# EAGLE board CT_schematic (EAGLE 7.6.0)

Size 100 x 80 mm. Coordinates in mm from the lower left corner, seen from the top.
Outline: 0,0 100,0 100,80 0,80 0,0
Copper layers (1*16): Top 0.035mm / dielectric 1.5mm / Bottom 0.035mm
Design rules "default": minimum track width 10mil, minimum drill 24mil, track to track 8mil, track to pad 8mil, pad to pad 8mil, via to via 8mil, smd to smd 8mil, copper to edge 40mil, drill to drill 8mil, minimum pad ring 10mil, minimum via ring 8mil, stop-mask expansion 4mil, vias tented up to drill 0mil, thermal gap 10mil

## Footprints (pad centres in the part's own frame; a part is rotated, then mirrored left to right if it is on the bottom)
C0603 = smd 0.8 x 0.8: 1 -0.762,0; 2 0.762,0
C0402 = smd 0.5 x 0.5: 1 -0.508,0; 2 0.508,0
C0805 = smd 1.2 x 1.3: 1 -1.016,0; 2 1.016,0
C1210 = smd 1.2 x 2.5: 1 -1.524,0; 2 1.524,0
C1206 = smd 1.3 x 1.6: 1 -1.524,0; 2 1.524,0
R0603 = smd 0.8 x 0.8: 1 -0.762,0; 2 0.762,0
EXV-9H = smd 3.505 x 1.676: 1 -2.857,0; 2 2.857,0
L0603 = smd 0.8 x 0.8: 1 -0.762,0; 2 0.762,0
DR1040 = smd 1.6 x 3.2: 1 -4.458,0; 2 4.458,0
PJ-037B_PACKAGE = drill 3.7 square: 1 12,0 | drill 3.2 square: 2 6,0
UFBGA176_25 = smd 0.3 x 0.3: A1 -4.55,4.55; A2 -3.9,4.55; A3 -3.25,4.55; A4 -2.6,4.55; A5 -1.95,4.55; A6 -1.3,4.55; A7 -0.65,4.55; A8 0,4.55; A9 0.65,4.55; A10 1.3,4.55; A11 1.95,4.55; A12 2.6,4.55; A13 3.25,4.55; A14 3.9,4.55; A15 4.55,4.55; B1 -4.55,3.9; B2 -3.9,3.9; B3 -3.25,3.9; B4 -2.6,3.9; B5 -1.95,3.9; B6 -1.3,3.9; B7 -0.65,3.9; B8 0,3.9; B9 0.65,3.9; B10 1.3,3.9; B11 1.95,3.9; B12 2.6,3.9; B13 3.25,3.9; B14 3.9,3.9; B15 4.55,3.9; C1 -4.55,3.25; C2 -3.9,3.25; C3 -3.25,3.25; C4 -2.6,3.25; C5 -1.95,3.25; C6 -1.3,3.25; C7 -0.65,3.25; C8 0,3.25; C9 0.65,3.25; C10 1.3,3.25; C11 1.95,3.25; C12 2.6,3.25; C13 3.25,3.25; C14 3.9,3.25; C15 4.55,3.25; D1 -4.55,2.6; D2 -3.9,2.6; D3 -3.25,2.6; D4 -2.6,2.6; D5 -1.95,2.6; D6 -1.3,2.6; D7 -0.65,2.6; D8 0,2.6; D9 0.65,2.6; D10 1.3,2.6; D11 1.95,2.6; D12 2.6,2.6; D13 3.25,2.6; D14 3.9,2.6; D15 4.55,2.6; E1 -4.55,1.95; E2 -3.9,1.95; E3 -3.25,1.95; E4 -2.6,1.95; E12 2.6,1.95; E13 3.25,1.95; E14 3.9,1.95; E15 4.55,1.95; F1 -4.55,1.3; F2 -3.9,1.3; F3 -3.25,1.3; F4 -2.6,1.3; F6 -1.3,1.3; F7 -0.65,1.3; F8 0,1.3; F9 0.65,1.3; F10 1.3,1.3; F12 2.6,1.3; F13 3.25,1.3; F14 3.9,1.3; F15 4.55,1.3; G1 -4.55,0.65; G2 -3.9,0.65; G3 -3.25,0.65; G4 -2.6,0.65; G6 -1.3,0.65; G7 -0.65,0.65; G8 0,0.65; G9 0.65,0.65; G10 1.3,0.65; G12 2.6,0.65; G13 3.25,0.65; G14 3.9,0.65; G15 4.55,0.65; H1 -4.55,0; H2 -3.9,0; H3 -3.25,0; H4 -2.6,0; H6 -1.3,0; H7 -0.65,0; H8 0,0; H9 0.65,0; H10 1.3,0; H12 2.6,0; H13 3.25,0; H14 3.9,0; H15 4.55,0; J1 -4.55,-0.65; J2 -3.9,-0.65; J3 -3.25,-0.65; J4 -2.6,-0.65; J6 -1.3,-0.65; J7 -0.65,-0.65; J8 0,-0.65; J9 0.65,-0.65; J10 1.3,-0.65; J12 2.6,-0.65; J13 3.25,-0.65; J14 3.9,-0.65; J15 4.55,-0.65; K1 -4.55,-1.3; K2 -3.9,-1.3; K3 -3.25,-1.3; K4 -2.6,-1.3; K6 -1.3,-1.3; K7 -0.65,-1.3; K8 0,-1.3; K9 0.65,-1.3; K10 1.3,-1.3; K12 2.6,-1.3; K13 3.25,-1.3; K14 3.9,-1.3; K15 4.55,-1.3; L1 -4.55,-1.95; L2 -3.9,-1.95; L3 -3.25,-1.95; L4 -2.6,-1.95; L12 2.6,-1.95; L13 3.25,-1.95; L14 3.9,-1.95; L15 4.55,-1.95; M1 -4.55,-2.6; M2 -3.9,-2.6; M3 -3.25,-2.6; M4 -2.6,-2.6; M5 -1.95,-2.6; M6 -1.3,-2.6; M7 -0.65,-2.6; M8 0,-2.6; M9 0.65,-2.6; M10 1.3,-2.6; M11 1.95,-2.6; M12 2.6,-2.6; M13 3.25,-2.6; M14 3.9,-2.6; M15 4.55,-2.6; N1 -4.55,-3.25; N2 -3.9,-3.25; N3 -3.25,-3.25; N4 -2.6,-3.25; N5 -1.95,-3.25; N6 -1.3,-3.25; N7 -0.65,-3.25; N8 0,-3.25; N9 0.65,-3.25; N10 1.3,-3.25; N11 1.95,-3.25; N12 2.6,-3.25; N13 3.25,-3.25; N14 3.9,-3.25; N15 4.55,-3.25; P1 -4.55,-3.9; P2 -3.9,-3.9; P3 -3.25,-3.9; P4 -2.6,-3.9; P5 -1.95,-3.9; P6 -1.3,-3.9; P7 -0.65,-3.9; P8 0,-3.9; P9 0.65,-3.9; P10 1.3,-3.9; P11 1.95,-3.9; P12 2.6,-3.9; P13 3.25,-3.9; P14 3.9,-3.9; P15 4.55,-3.9; R1 -4.55,-4.55; R2 -3.9,-4.55; R3 -3.25,-4.55; R4 -2.6,-4.55; R5 -1.95,-4.55; R6 -1.3,-4.55; R7 -0.65,-4.55; R8 0,-4.55; R9 0.65,-4.55; R10 1.3,-4.55; R11 1.95,-4.55; R12 2.6,-4.55; R13 3.25,-4.55; R14 3.9,-4.55; R15 4.55,-4.55
ARDUCAM = drill 1 pad 1.8 square: 1 0,0 | drill 1 pad 1.8: 2 0,2.54; 3 2.54,0; 4 2.54,2.54; 5 5.08,0; 6 5.08,2.54; 7 7.62,0; 8 7.62,2.54; 9 10.16,0; 10 10.16,2.54; 11 12.7,0; 12 12.7,2.54; 13 15.24,0; 14 15.24,2.54; 15 17.78,0; 16 17.78,2.54; 17 20.32,0; 18 20.32,2.54; 19 22.86,0; 20 22.86,2.54
SSOP-28 = smd 1.5 x 0.4: 1 -3.625,4.225; 2 -3.625,3.575; 3 -3.625,2.925; 4 -3.625,2.275; 5 -3.625,1.625; 6 -3.625,0.975; 7 -3.625,0.325; 8 -3.625,-0.325; 9 -3.625,-0.975; 10 -3.625,-1.625; 11 -3.625,-2.275; 12 -3.625,-2.925; 13 -3.625,-3.575; 14 -3.625,-4.225; 15 3.625,-4.225; 16 3.625,-3.575; 17 3.625,-2.925; 18 3.625,-2.275; 19 3.625,-1.625; 20 3.625,-0.975; 21 3.625,-0.325; 22 3.625,0.325; 23 3.625,0.975; 24 3.625,1.625; 25 3.625,2.275; 26 3.625,2.925; 27 3.625,3.575; 28 3.625,4.225
FCI_10118193-0001LF = smd 0.4 x 1.35: 1 -1.3,2.675; 2 -0.65,2.675; 3 0,2.675; 4 0.65,2.675; 5 1.3,2.675 | smd 1.6 x 1.4: 6 -3.2,2.45; 7 3.2,2.45 | smd 1.9 x 1.9: 8 -1.2,0; 9 1.2,0 | hole 0.5: -3.3,0; 3.3,0
SAMTEC_FTSH-105-01-L-DV-K = smd 0.762 x 2.794: 1 -2.54,-2.032; 2 -2.54,2.032; 3 -1.27,-2.032; 4 -1.27,2.032; 5 0,-2.032; 6 0,2.032; 7 1.27,-2.032; 8 1.27,2.032; 9 2.54,-2.032; 10 2.54,2.032
LGA-8 = smd 0.838 x 0.559: 1 -1.003,1.875; 2 -1.003,0.625; 3 -1.003,-0.625; 4 -1.003,-1.875; 5 1.003,-1.875; 6 1.003,-0.625; 7 1.003,0.625; 8 1.003,1.875
LBGA-64 = smd 0.559 x 0.559: A1 -3.5,3.5; A2 -2.5,3.5; A3 -1.5,3.5; A4 -0.5,3.5; A5 0.5,3.5; A6 1.5,3.5; A7 2.5,3.5; A8 3.5,3.5; B1 -3.5,2.5; B2 -2.5,2.5; B3 -1.5,2.5; B4 -0.5,2.5; B5 0.5,2.5; B6 1.5,2.5; B7 2.5,2.5; B8 3.5,2.5; C1 -3.5,1.5; C2 -2.5,1.5; C3 -1.5,1.5; C4 -0.5,1.5; C5 0.5,1.5; C6 1.5,1.5; C7 2.5,1.5; C8 3.5,1.5; D1 -3.5,0.5; D2 -2.5,0.5; D3 -1.5,0.5; D4 -0.5,0.5; D5 0.5,0.5; D6 1.5,0.5; D7 2.5,0.5; D8 3.5,0.5; E1 -3.5,-0.5; E2 -2.5,-0.5; E3 -1.5,-0.5; E4 -0.5,-0.5; E5 0.5,-0.5; E6 1.5,-0.5; E7 2.5,-0.5; E8 3.5,-0.5; F1 -3.5,-1.5; F2 -2.5,-1.5; F3 -1.5,-1.5; F4 -0.5,-1.5; F5 0.5,-1.5; F6 1.5,-1.5; F7 2.5,-1.5; F8 3.5,-1.5; G1 -3.5,-2.5; G2 -2.5,-2.5; G3 -1.5,-2.5; G4 -0.5,-2.5; G5 0.5,-2.5; G6 1.5,-2.5; G7 2.5,-2.5; G8 3.5,-2.5; H1 -3.5,-3.5; H2 -2.5,-3.5; H3 -1.5,-3.5; H4 -0.5,-3.5; H5 0.5,-3.5; H6 1.5,-3.5; H7 2.5,-3.5; H8 3.5,-3.5
SOT143B = smd 1 x 0.7: 1 -0.75,-1 | smd 0.6 x 0.7: 2 0.95,-1; 3 0.95,1; 4 -0.95,1
ABLS-25.000MHZ-B2F-T = smd 5.6 x 2.8: 1 -3.81,0; 2 5.69,0
ABLS-12.000MHZ-B4-T = smd 5.6 x 2.8: 1 0,0; 2 9.5,0
ASEK = smd 1.4 x 1: 1 -1.1,-0.8; 2 1.1,-0.8; 3 1.1,0.8; 4 -1.1,0.8
ASFL1 = smd 1.7 x 1.5: 1 -1.27,-1.1; 2 1.27,-1.1; 3 1.27,1.1; 4 -1.27,1.1
WSON-8 = smd 0.3 x 0.6: 1 -0.75,0; 2 0.05,0; 3 0.85,0; 4 1.65,0; 5 1.65,3.8; 6 0.85,3.8; 7 0.05,3.8; 8 -0.75,3.8 | smd 3 x 2.6: PAD 0.45,1.9
HTSSOP14 = smd 1.676 x 0.356: 1 -2.8,1.95; 2 -2.8,1.3; 3 -2.8,0.65; 4 -2.8,0; 5 -2.8,-0.65; 6 -2.8,-1.3; 7 -2.8,-1.95; 8 2.8,-1.95; 9 2.8,-1.3; 10 2.8,-0.65; 11 2.8,0; 12 2.8,0.65; 13 2.8,1.3; 14 2.8,1.95 | smd 3 x 5: 15 0,0 | drill 0.4 pad 0.45: P$1 -0.75,1.5; P$2 0.75,1.5; P$3 -0.75,0; P$4 0.8,0; P$5 -0.75,-1.5; P$6 0.9,-1.5
QFN-38_UHF = smd 0.75 x 0.3: 1 -2.4,2.75; 2 -2.4,2.25; 3 -2.4,1.75; 4 -2.4,1.25; 6 -2.4,0.25; 7 -2.4,-0.25; 8 -2.4,-0.75; 9 -2.4,-1.25; 10 -2.4,-1.75; 11 -2.4,-2.25; 12 -2.4,-2.75; 20 2.4,-2.75; 21 2.4,-2.25; 22 2.4,-1.75; 23 2.4,-1.25; 24 2.4,-0.75; 25 2.4,-0.25; 26 2.4,0.25; 27 2.4,0.75; 28 2.4,1.25; 29 2.4,1.75; 30 2.4,2.25; 31 2.4,2.75 | smd 0.758 x 0.3: 5 -2.4,0.75 | smd 0.3 x 0.75: 13 -1.5,-3.4; 14 -1,-3.4; 15 -0.5,-3.4; 16 0,-3.4; 17 0.5,-3.4; 18 1,-3.4; 19 1.5,-3.4; 32 1.5,3.4; 33 1,3.4; 34 0.5,3.4; 35 0,3.4; 36 -0.5,3.4; 37 -1,3.4; 38 -1.5,3.4 | smd 3.2 x 5.2: 39 0,0
IRF8306MTRPBF = smd 0.9 x 1.85: 1 0,0; 2 0,-2.35; 6 6.4,0; 7 6.4,-2.35 | smd 0.75 x 0.75: 3 1.75,-1.175 | smd 1.45 x 0.87: 4 3.5,-0.565; 5 3.5,-1.785
SW_4-1437565-2 = smd 1.4 x 2.1: 1 -2.23,4.55; 2 -2.23,-4.55; 3 2.23,4.55; 4 2.23,-4.55
LGM67K-G1J2-24-Z = smd 0.8 x 1.4: A -2,0; C 0,0
NC7SZ125M5X = smd 1.3 x 0.7: 1 -1.3,0.95; 2 -1.3,0; 3 -1.3,-0.95; 4 1.3,-0.95; 5 1.3,0.95

## Placement (x,y rotation side)
C1  1e-06  [C0603]  -41.91,76.2 0 top  (outside the outline)
C2  1e-07  [C0603]  -45.72,76.2 0 top  (outside the outline)
C3  1e-07  [C0603]  -49.53,76.2 0 top  (outside the outline)
C4  1e-07  [C0603]  -53.34,76.2 0 top  (outside the outline)
C5  1e-07  [C0603]  -57.15,76.2 0 top  (outside the outline)
C6  1e-07  [C0603]  -60.96,76.2 0 top  (outside the outline)
C7  1e-07  [C0603]  -64.77,76.2 0 top  (outside the outline)
C8  1e-07  [C0603]  -68.58,76.2 0 top  (outside the outline)
C9  1e-07  [C0603]  -72.39,76.2 0 top  (outside the outline)
C10  1e-07  [C0603]  -76.2,76.2 0 top  (outside the outline)
C11  1e-07  [C0603]  -80.01,76.2 0 top  (outside the outline)
C12  1e-07  [C0603]  -83.82,76.2 0 top  (outside the outline)
C13  1e-07  [C0603]  -87.63,76.2 0 top  (outside the outline)
C14  1e-07  [C0603]  -15.24,81.28 0 top  (outside the outline)
C15  1e-07  [C0603]  -19.05,81.28 0 top  (outside the outline)
C16  1e-07  [C0603]  -22.86,81.28 0 top  (outside the outline)
C17  4.7e-06  [C0603]  -34.29,76.2 0 top  (outside the outline)
C18  1e-08  [C0603]  -26.67,81.28 0 top  (outside the outline)
C19  1e-06  [C0603]  -30.48,81.28 0 top  (outside the outline)
C20  1e-07  [C0603]  -34.29,81.28 0 top  (outside the outline)
C21  1e-07  [C0603]  -38.1,81.28 0 top  (outside the outline)
C22  1e-07  [C0603]  -41.91,81.28 0 top  (outside the outline)
C23  1e-11  [C0402]  -31.75,86.36 0 top  (outside the outline)
C24  1e-11  [C0402]  -35.56,86.36 0 top  (outside the outline)
C26  1e-06  [C0603]  -45.72,81.28 0 top  (outside the outline)
C27  1e-07  [C0402]  -39.37,86.36 0 top  (outside the outline)
C28  4.7e-06  [C0805]  -78.74,59.69 0 top  (outside the outline)
C29  1e-07  [C0402]  -43.18,86.36 0 top  (outside the outline)
C30  1e-07  [C0402]  -46.99,86.36 0 top  (outside the outline)
C31  1e-07  [C0402]  -50.8,86.36 0 top  (outside the outline)
C32  1e-07  [C0402]  -54.61,86.36 0 top  (outside the outline)
C33  1e-05  [C0805]  -83.82,59.69 0 top  (outside the outline)
C34  1e-07  [C0402]  -58.42,86.36 0 top  (outside the outline)
C35  1e-07  [C0402]  -62.23,86.36 0 top  (outside the outline)
C36  1e-08  [C0402]  -66.04,86.36 0 top  (outside the outline)
C37  1e-08  [C0402]  -69.85,86.36 0 top  (outside the outline)
C38  1e-08  [C0402]  -73.66,86.36 0 top  (outside the outline)
C39  1e-08  [C0402]  -77.47,86.36 0 top  (outside the outline)
C40  1e-08  [C0402]  -81.28,86.36 0 top  (outside the outline)
C41  1e-05  [C1210]  -87.63,52.07 0 top  (outside the outline)
C42  1e-05  [C0805]  -88.9,59.69 0 top  (outside the outline)
C43  1e-06  [C0603]  -49.53,81.28 0 top  (outside the outline)
C44  3.3e-09  [C0402]  -27.94,86.36 0 top  (outside the outline)
C45  1e-07  [C0402]  -85.09,86.36 0 top  (outside the outline)
C46  2.2e-05  [C1210]  -16.51,59.69 0 top  (outside the outline)
C47  2.2e-05  [C1210]  -22.86,59.69 0 top  (outside the outline)
C48  1e-05  [C1206]  -41.91,59.69 0 top  (outside the outline)
C49  1e-05  [C1206]  -48.26,59.69 0 top  (outside the outline)
C50  1e-08  [C0402]  -88.9,86.36 0 top  (outside the outline)
C51  1e-05  [C1210]  -29.21,59.69 0 top  (outside the outline)
C52  1e-05  [C0805]  -15.24,66.04 0 top  (outside the outline)
C53  1e-07  [C0402]  -15.24,91.44 0 top  (outside the outline)
C54  2.2e-06  [C0603]  -38.1,76.2 0 top  (outside the outline)
C55  2.45e-08  [R0603]  -60.96,66.04 0 top  (outside the outline)
C56  2.8258362168397e-09  [R0603]  -25.4,66.04 0 top  (outside the outline)
C57  7.105e-09  [R0603]  -45.72,66.04 0 top  (outside the outline)
C58  0.0001  [EXV-9H]  -46.99,44.45 0 top  (outside the outline)
C59  0.0001  [EXV-9H]  -58.42,44.45 0 top  (outside the outline)
C60  1e-08  [C0402]  -19.05,91.44 0 top  (outside the outline)
C61  1e-08  [C0402]  -22.86,91.44 0 top  (outside the outline)
C62  1e-08  [C0402]  -26.67,91.44 0 top  (outside the outline)
C63  1e-08  [C0402]  -30.48,91.44 0 top  (outside the outline)
F1  240.0  [L0603]  -53.34,81.28 0 top  (outside the outline)
I1  7e-06  [DR1040]  -54.61,21.59 0 top  (outside the outline)
J1  PJ-037B  [PJ-037B_PACKAGE]  -27.94,24.13 0 top  (outside the outline)
R2  1000.0  [R0603]  -57.15,81.28 0 top  (outside the outline)
R7  4700.0  [R0603]  -60.96,81.28 0 top  (outside the outline)
R8  4700.0  [R0603]  -64.77,81.28 0 top  (outside the outline)
R9  4700.0  [R0603]  -68.58,81.28 0 top  (outside the outline)
R10  2200.0  [R0603]  -72.39,81.28 0 top  (outside the outline)
R12  2200.0  [R0603]  -76.2,81.28 0 top  (outside the outline)
R14  10000.0  [R0603]  -66.04,66.04 0 top  (outside the outline)
R15  10000.0  [R0603]  -71.12,66.04 0 top  (outside the outline)
R16  10000.0  [R0603]  -76.2,66.04 0 top  (outside the outline)
R17  4700.0  [R0603]  -80.01,81.28 0 top  (outside the outline)
R18  10000.0  [R0603]  -81.28,66.04 0 top  (outside the outline)
R19  10000.0  [R0603]  -86.36,66.04 0 top  (outside the outline)
R20  10000.0  [R0603]  -15.24,71.12 0 top  (outside the outline)
R21  10000.0  [R0603]  -20.32,71.12 0 top  (outside the outline)
R22  10000.0  [R0603]  -25.4,71.12 0 top  (outside the outline)
R23  10000.0  [R0603]  -30.48,71.12 0 top  (outside the outline)
R24  5.0  [R0603]  -83.82,81.28 0 top  (outside the outline)
R25  10000.0  [R0603]  -35.56,71.12 0 top  (outside the outline)
R26  10000.0  [R0603]  -40.64,71.12 0 top  (outside the outline)
R27  10000.0  [R0603]  -45.72,71.12 0 top  (outside the outline)
R28  10000.0  [R0603]  -50.8,71.12 0 top  (outside the outline)
R29  10000.0  [R0603]  -55.88,71.12 0 top  (outside the outline)
R30  100000.0  [R0603]  -50.8,66.04 0 top  (outside the outline)
R31  200.0  [R0603]  -87.63,81.28 0 top  (outside the outline)
R32  1000.0  [R0603]  -15.24,86.36 0 top  (outside the outline)
R33  71007.101651032  [R0603]  -33.02,66.04 0 top  (outside the outline)
R34  22000.0  [R0603]  -60.96,71.12 0 top  (outside the outline)
R35  100000.0  [R0603]  -55.88,66.04 0 top  (outside the outline)
R36  200.0  [R0603]  -19.05,86.36 0 top  (outside the outline)
R37  1000.0  [R0603]  -22.86,86.36 0 top  (outside the outline)
R38  10000.0  [R0603]  -66.04,71.12 0 top  (outside the outline)
R39  75000.0  [R0603]  -71.12,71.12 0 top  (outside the outline)
R40  10000.0  [R0603]  -76.2,71.12 0 top  (outside the outline)
R41  10000.0  [R0603]  -81.28,71.12 0 top  (outside the outline)
R42  95300.0  [R0603]  -86.36,71.12 0 top  (outside the outline)
R43  95300.0  [R0603]  -15.24,76.2 0 top  (outside the outline)
R44  10000.0  [R0603]  -20.32,76.2 0 top  (outside the outline)
R45  10000.0  [R0603]  -25.4,76.2 0 top  (outside the outline)
R46  10000.0  [R0603]  -30.48,76.2 0 top  (outside the outline)
R47  112254.54545455  [R0603]  -40.64,66.04 0 top  (outside the outline)
U1  STM32F745IGK6  [UFBGA176_25]  -76.2,6.35 0 top  (outside the outline)
U2  arducam_ov2640  [ARDUCAM]  -59.69,50.8 0 top  (outside the outline)
U3  FT232RL-REEL  [SSOP-28]  -34.29,7.62 0 top  (outside the outline)
U4  10118193-0001LF  [FCI_10118193-0001LF]  -76.2,34.29 0 top  (outside the outline)
U5  FTSH-105-01-L-DV-K  [SAMTEC_FTSH-105-01-L-DV-K]  -63.5,7.62 0 top  (outside the outline)
U6  MPL3115A2R1  [LGA-8]  -34.29,59.69 0 top  (outside the outline)
U7  mt28ew512aba1HPC-0AAT  [LBGA-64]  -19.05,7.62 0 top  (outside the outline)
U8  10118193-0001LF  [FCI_10118193-0001LF]  -86.36,34.29 0 top  (outside the outline)
U9  prtr5v0u2ax  [SOT143B]  -43.18,91.44 0 top  (outside the outline)
U10  ABLS-25.000MHZ-B2F-T  [ABLS-25.000MHZ-B2F-T]  -77.47,44.45 0 top  (outside the outline)
U11  ABLS-12.000MHZ-B4-T  [ABLS-12.000MHZ-B4-T]  -29.21,53.34 0 top  (outside the outline)
U12  ASEK-32.768KHz-ECST  [ASEK]  -38.1,44.45 0 top  (outside the outline)
U13  ASFL1-25MHZ-NCS  [ASFL1]  -67.31,35.56 0 top  (outside the outline)
U14  LP3878SDX-ADJ/NOPB  [WSON-8]  -30.48,34.29 0 top  (outside the outline)
U15  tps54225PWP  [HTSSOP14]  -67.31,52.07 0 top  (outside the outline)
U16  LP3878SDX-ADJ/NOPB  [WSON-8]  -50.8,34.29 0 top  (outside the outline)
U17  LTC2928CUHF#PBF  [QFN-38_UHF]  -16.51,44.45 0 top  (outside the outline)
U18  IRF8306MTRPbF  [IRF8306MTRPBF]  -73.66,22.86 0 top  (outside the outline)
U19  IRF8306MTRPbF  [IRF8306MTRPBF]  -88.9,22.86 0 top  (outside the outline)
U20  4-1437565-2  [SW_4-1437565-2]  -44.45,22.86 0 top  (outside the outline)
U21  Q65110A2395  [LGM67K-G1J2-24-Z]  -76.2,52.07 0 top  (outside the outline)
U22  nc7sz125m5x  [NC7SZ125M5X]  -53.34,59.69 0 top  (outside the outline)
U23  nc7sz125m5x  [NC7SZ125M5X]  -59.69,59.69 0 top  (outside the outline)
U24  nc7sz125m5x  [NC7SZ125M5X]  -66.04,59.69 0 top  (outside the outline)
U25  nc7sz125m5x  [NC7SZ125M5X]  -72.39,59.69 0 top  (outside the outline)

## Library data of the parts
C1-C24 C26-C63 F1 I1 J1 R2 R7-R10 R12 R14-R47 U1-U25 = circuit_tree

## Nets
CLK_CRYSTAL_U1_G1: C23.1 U1.G1 U10.1
CLK_CRYSTAL_U1_H1: C24.1 U1.H1 U10.2
CLK_CRYSTAL_U3_27: U3.27 U11.1
CLK_CRYSTAL_U3_28: U3.28 U11.2
CLK_U1_E1: U1.E1 U12.3
CLK_U2_8: U2.8 U13.3
GND: C1.2 C2.2 C3.2 C4.2 C5.2 C6.2 C7.2 C8.2 C9.2 C10.2 C11.2 C12.2 C13.2 C14.2 C15.2 C16.2 C17.2 C18.2 C19.2 C20.2 C21.2 C22.2 C23.2 C24.2 C26.2 C27.2 C28.2 C29.2 C30.2 C31.2 C32.2 C33.2 C34.2 C35.2 C36.2 C37.2 C38.2 C39.2 C40.2 C41.2 C42.2 C43.2 C44.2 C46.2 C47.2 C48.2 C49.2 C50.2 C51.2 C52.2 C53.2 C54.2 C55.2 C56.2 C57.2 C58.2 C59.2 C60.2 C61.2 C62.2 C63.2 J1.2 R2.2 R14.2 R19.2 R23.2 R24.2 R32.2 R34.2 R37.2 R39.2 R42.2 R43.2 R44.2 R45.2 R46.2 U1.D5 U1.D7 U1.D8 U1.D9 U1.F2 U1.F6 U1.F7 U1.F8 U1.F9 U1.F10 U1.F12 U1.G2 U1.G6 U1.G7 U1.G8 U1.G9 U1.G10 U1.G12 U1.H6 U1.H7 U1.H8 U1.H9 U1.H10 U1.H12 U1.J6 U1.J7 U1.J8 U1.J9 U1.J10 U1.K6 U1.K7 U1.K8 U1.K9 U1.K10 U1.M1 U1.M8 U1.M9 U1.N1 U2.2 U2.20 U3.7 U3.18 U3.21 U3.25 U3.26 U4.5 U4.6 U4.7 U4.8 U4.9 U5.3 U5.5 U6.3 U7.E8 U7.H2 U7.H7 U8.5 U8.6 U8.7 U8.8 U8.9 U9.1 U12.2 U13.2 U14.3 U14.PAD U15.5 U15.8 U15.9 U15.15 U16.3 U16.PAD U17.8 U17.9 U17.10 U17.12 U17.13 U17.24 U17.25 U17.30 U17.32 U17.39 U21.C U22.2 U22.3 U23.1 U23.3 U24.1 U24.3 U25.1 U25.3
NET_U1_A5: R10.1 U1.A5 U6.8
NET_U1_B4: R12.1 U1.B4 U6.7
NET_U1_C6: R15.1 U1.C6
NET_U1_D6: R14.1 U1.D6
NET_U1_F13: C22.1 U1.F13
NET_U1_J1: R8.1 U1.J1 U24.4
NET_U1_L4: R16.1 U1.L4
NET_U1_R1: C18.1 C19.1 F1.1 U1.P1 U1.R1
NET_U1_R14: U21.A
NET_U1_R15: U20.3 U20.4
NET_U2_19: R9.1 U2.19 U25.4
NET_U3_14: R18.1 U3.14
NET_U3_17: C29.1 U3.17
NET_U3_19: R19.1 U3.19
NET_U4_1: R17.1 U4.1
NET_U4_2: U3.16 U4.2
NET_U4_3: U3.15 U4.3
NET_U4_19: R17.2
NET_U5_9: R24.1 U5.9
NET_U6_2: C35.1 U6.2
NET_U7_B4: R28.1 U7.B4
NET_U7_B5: R7.1 U7.B5 U23.4
NET_U14_1: C40.1 U14.1
NET_U14_6: R31.2 R32.1 U14.6
NET_U14_8: R30.1 U14.8
NET_U15_2: R33.2 R34.1 U15.2
NET_U15_3: C43.1 U15.3
NET_U15_4: C44.1 U15.4
NET_U15_10: C45.1 I1.1 U15.10 U15.11
NET_U15_12: C45.2 U15.12
NET_U16_1: C50.1 U16.1
NET_U16_6: R36.2 R37.1 U16.6
NET_U16_8: R35.1 U16.8
NET_U17_3: R45.1 U17.3
NET_U17_6: R42.1 U17.6
NET_U17_7: R43.1 U17.7
NET_U17_16: R44.1 R47.1 U17.16
NET_U17_18: R41.1 U17.18
NET_U17_19: R40.1 U17.19 U17.20
NET_U17_21: R38.1 R39.1 U17.21 U22.4 U23.2 U24.2 U25.2
NET_U17_22: C53.1 R38.2 R40.2 R41.2 U17.11 U17.22
NET_U17_26: C56.1 U17.26
NET_U17_27: C55.1 U17.27
NET_U17_28: C57.1 U17.28
NET_U17_38: R46.1 U17.38
NET_U18_3: U17.2 U18.3
NET_U19_3: U17.37 U19.3
NET_U20_1: R2.1 U20.1 U20.2
PROC_DCMI_D0: U1.H15 U2.18
PROC_DCMI_D1: U1.D15 U2.17
PROC_DCMI_D2: U1.B10 U2.16
PROC_DCMI_D3: U1.A3 U2.15
PROC_DCMI_D4: U1.B13 U2.14
PROC_DCMI_D5: U1.B6 U2.13
PROC_DCMI_D6: U1.C3 U2.12
PROC_DCMI_D7: U1.C2 U2.11
PROC_DCMI_D8: U1.B14 U2.10
PROC_DCMI_D9: U1.C14 U2.9
PROC_DCMI_HSYNC: U1.M12 U2.6
PROC_DCMI_PIXCLK: U1.P3 U2.7
PROC_DCMI_VSYNC: U1.B5 U2.5
PROC_FMC_A0: U1.E2 U7.E2
PROC_FMC_A1: U1.H3 U7.D2
PROC_FMC_A2: U1.H2 U7.C2
PROC_FMC_A3: U1.J2 U7.A2
PROC_FMC_A4: U1.J3 U7.B2
PROC_FMC_A5: U1.K3 U7.D3
PROC_FMC_A6: U1.P6 U7.C3
PROC_FMC_A9: U1.P7 U7.A6
PROC_FMC_A10: U1.N7 U7.C6
PROC_FMC_A11: U1.M7 U7.D6
PROC_FMC_A12: U1.L15 U7.B7
PROC_FMC_A13: U1.K15 U7.A7
PROC_FMC_A14: U1.K14 U7.C7
PROC_FMC_A15: U1.K13 U7.D7
PROC_FMC_A16: U1.N14 U7.E7
PROC_FMC_A17: U1.N13 U7.B3
PROC_FMC_A18: U1.M15 U7.C4
PROC_FMC_A19: U1.A1 U7.D5
PROC_FMC_A20: U1.B1 U7.D4
PROC_FMC_A21: U1.B2 U7.C5
PROC_FMC_A22: U1.B3 U7.B8
PROC_FMC_A23: U1.A2 U7.C8
PROC_FMC_A24: U1.A8 U7.F8
PROC_FMC_D0: U1.M14 U7.E3
PROC_FMC_D1: U1.L14 U7.H3
PROC_FMC_D2: U1.B12 U7.E4
PROC_FMC_D3: U1.C12 U7.H4
PROC_FMC_D4: U1.R8 U7.H5
PROC_FMC_D5: U1.P8 U7.E5
PROC_FMC_D6: U1.P9 U7.H6
PROC_FMC_D7: U1.R9 U7.E6
PROC_FMC_D8: U1.P10 U7.F3
PROC_FMC_D9: U1.R10 U7.G3
PROC_FMC_D10: U1.N11 U7.F4
PROC_FMC_D11: U1.P11 U7.G4
PROC_FMC_D12: U1.R11 U7.F5
PROC_FMC_D13: U1.P15 U7.G6
PROC_FMC_D14: U1.P14 U7.F6
PROC_FMC_D15: U1.N15 U7.G7
PROC_FMC_NBL0: R29.1 U1.A4 U7.F7
PROC_FMC_NE2: R25.1 U1.C10 U7.F2
PROC_FMC_NOE: R26.1 U1.D10 U7.G2
PROC_FMC_NWAIT: U1.B11 U7.A4
PROC_FMC_NWE: R27.1 U1.C11 U7.A5
PROC_SYS_JTCK_SWCLK: R23.1 U1.A14 U5.4
PROC_SYS_JTDI: R21.1 U1.A13 U5.8
PROC_SYS_JTDO_SWO: U1.A10 U5.6
PROC_SYS_JTMS_SWDIO: R22.1 U1.A15 U5.2
PROC_UART5_CTS: U1.F14 U3.3
PROC_UART5_RTS: U1.G14 U3.11
PROC_UART5_RX: U1.D12 U3.1
PROC_UART5_TX: U1.A12 U3.5
PROC_USB_OTG_FS_DM: U8.2 U9.3
PROC_USB_OTG_FS_DP: U8.3 U9.2
PROC_USB_OTG_FS_VBUS: U8.1 U9.4
RST_OUT_U5_JTAG_RST_B: R20.1 U5.10 U22.1
VCC_13V7: C54.1 C58.1 C59.1 J1.1 R47.2 U17.23 U18.1 U18.2 U18.6 U18.7 U19.1 U19.2 U19.6 U19.7
VCC_S1_13V7: C41.1 C48.1 C49.1 R30.2 U14.4 U15.7 U15.13 U15.14 U18.4 U18.5
VCC_S2_13V7: C51.1 R35.2 U16.4 U19.4 U19.5
VCC_TIER1_1V2: C21.1 C42.1 R31.1 U1.M10 U14.5
VCC_TIER1_3V3: C1.1 C2.1 C3.1 C4.1 C5.1 C6.1 C7.1 C8.1 C9.1 C10.1 C11.1 C12.1 C13.1 C14.1 C15.1 C16.1 C17.1 C20.1 C26.1 C27.1 C28.1 C30.1 C31.1 C32.1 C33.1 C34.1 C36.1 C37.1 C38.1 C39.1 C46.1 C47.1 C60.1 C61.1 C62.1 C63.1 F1.2 I1.2 R7.2 R8.2 R9.2 R10.2 R12.2 R15.2 R16.2 R18.2 R20.2 R21.2 R22.2 R25.2 R26.2 R27.2 R28.2 R29.2 R33.1 U1.C1 U1.C5 U1.C7 U1.C8 U1.C9 U1.F3 U1.G3 U1.G13 U1.H13 U1.J12 U1.J13 U1.K4 U1.N8 U1.N9 U1.N10 U2.1 U3.4 U3.20 U5.1 U6.1 U6.4 U7.D8 U7.F1 U7.G5 U12.4 U13.4 U15.1 U22.5 U23.5 U24.5 U25.5
VCC_TIER2_1V2: C52.1 R36.1 U16.5

## Tracks (layer width: path | path; a pad name or v marks a point on that pad's centre or on a via)
CLK_CRYSTAL_U1_G1  (2 unrouted)
CLK_CRYSTAL_U1_H1  (2 unrouted)
CLK_CRYSTAL_U3_27  (1 unrouted)
CLK_CRYSTAL_U3_28  (1 unrouted)
CLK_U1_E1  (1 unrouted)
CLK_U2_8  (1 unrouted)
GND  (166 unrouted)
NET_U1_A5  (2 unrouted)
NET_U1_B4  (2 unrouted)
NET_U1_C6  (1 unrouted)
NET_U1_D6  (1 unrouted)
NET_U1_F13  (1 unrouted)
NET_U1_J1  (2 unrouted)
NET_U1_L4  (1 unrouted)
NET_U1_R1  (4 unrouted)
NET_U1_R15  (1 unrouted)
NET_U2_19  (2 unrouted)
NET_U3_14  (1 unrouted)
NET_U3_17  (1 unrouted)
NET_U3_19  (1 unrouted)
NET_U4_1  (1 unrouted)
NET_U4_2  (1 unrouted)
NET_U4_3  (1 unrouted)
NET_U5_9  (1 unrouted)
NET_U6_2  (1 unrouted)
NET_U7_B4  (1 unrouted)
NET_U7_B5  (2 unrouted)
NET_U14_1  (1 unrouted)
NET_U14_6  (2 unrouted)
NET_U14_8  (1 unrouted)
NET_U15_2  (2 unrouted)
NET_U15_3  (1 unrouted)
NET_U15_4  (1 unrouted)
NET_U15_10  (3 unrouted)
NET_U15_12  (1 unrouted)
NET_U16_1  (1 unrouted)
NET_U16_6  (2 unrouted)
NET_U16_8  (1 unrouted)
NET_U17_3  (1 unrouted)
NET_U17_6  (1 unrouted)
NET_U17_7  (1 unrouted)
NET_U17_16  (2 unrouted)
NET_U17_18  (1 unrouted)
NET_U17_19  (2 unrouted)
NET_U17_21  (6 unrouted)
NET_U17_22  (5 unrouted)
NET_U17_26  (1 unrouted)
NET_U17_27  (1 unrouted)
NET_U17_28  (1 unrouted)
NET_U17_38  (1 unrouted)
NET_U18_3  (1 unrouted)
NET_U19_3  (1 unrouted)
NET_U20_1  (2 unrouted)
PROC_DCMI_D0  (1 unrouted)
PROC_DCMI_D1  (1 unrouted)
PROC_DCMI_D2  (1 unrouted)
PROC_DCMI_D3  (1 unrouted)
PROC_DCMI_D4  (1 unrouted)
PROC_DCMI_D5  (1 unrouted)
PROC_DCMI_D6  (1 unrouted)
PROC_DCMI_D7  (1 unrouted)
PROC_DCMI_D8  (1 unrouted)
PROC_DCMI_D9  (1 unrouted)
PROC_DCMI_HSYNC  (1 unrouted)
PROC_DCMI_PIXCLK  (1 unrouted)
PROC_DCMI_VSYNC  (1 unrouted)
PROC_FMC_A0  (1 unrouted)
PROC_FMC_A1  (1 unrouted)
PROC_FMC_A2  (1 unrouted)
PROC_FMC_A3  (1 unrouted)
PROC_FMC_A4  (1 unrouted)
PROC_FMC_A5  (1 unrouted)
PROC_FMC_A6  (1 unrouted)
PROC_FMC_A9  (1 unrouted)
PROC_FMC_A10  (1 unrouted)
PROC_FMC_A11  (1 unrouted)
PROC_FMC_A12  (1 unrouted)
PROC_FMC_A13  (1 unrouted)
PROC_FMC_A14  (1 unrouted)
PROC_FMC_A15  (1 unrouted)
PROC_FMC_A16  (1 unrouted)
PROC_FMC_A17  (1 unrouted)
PROC_FMC_A18  (1 unrouted)
PROC_FMC_A19  (1 unrouted)
PROC_FMC_A20  (1 unrouted)
PROC_FMC_A21  (1 unrouted)
PROC_FMC_A22  (1 unrouted)
PROC_FMC_A23  (1 unrouted)
PROC_FMC_A24  (1 unrouted)
PROC_FMC_D0  (1 unrouted)
PROC_FMC_D1  (1 unrouted)
PROC_FMC_D2  (1 unrouted)
PROC_FMC_D3  (1 unrouted)
PROC_FMC_D4  (1 unrouted)
PROC_FMC_D5  (1 unrouted)
PROC_FMC_D6  (1 unrouted)
PROC_FMC_D7  (1 unrouted)
PROC_FMC_D8  (1 unrouted)
PROC_FMC_D9  (1 unrouted)
PROC_FMC_D10  (1 unrouted)
PROC_FMC_D11  (1 unrouted)
PROC_FMC_D12  (1 unrouted)
PROC_FMC_D13  (1 unrouted)
PROC_FMC_D14  (1 unrouted)
PROC_FMC_D15  (1 unrouted)
PROC_FMC_NBL0  (2 unrouted)
PROC_FMC_NE2  (2 unrouted)
PROC_FMC_NOE  (2 unrouted)
PROC_FMC_NWAIT  (1 unrouted)
PROC_FMC_NWE  (2 unrouted)
PROC_SYS_JTCK_SWCLK  (2 unrouted)
PROC_SYS_JTDI  (2 unrouted)
PROC_SYS_JTDO_SWO  (1 unrouted)
PROC_SYS_JTMS_SWDIO  (2 unrouted)
PROC_UART5_CTS  (1 unrouted)
PROC_UART5_RTS  (1 unrouted)
PROC_UART5_RX  (1 unrouted)
PROC_UART5_TX  (1 unrouted)
PROC_USB_OTG_FS_DM  (1 unrouted)
PROC_USB_OTG_FS_DP  (1 unrouted)
PROC_USB_OTG_FS_VBUS  (1 unrouted)
RST_OUT_U5_JTAG_RST_B  (2 unrouted)
VCC_13V7  (13 unrouted)
VCC_S1_13V7  (9 unrouted)
VCC_S2_13V7  (4 unrouted)
VCC_TIER1_1V2  (4 unrouted)
VCC_TIER1_3V3  (85 unrouted)
VCC_TIER2_1V2  (2 unrouted)